# Altium PCB BALL_DROPPER_REV3.PcbDoc (part 1 of 2)
Units mil, origin at the board's own origin, x right, y up, seen from the top; angles counter-clockwise.
Board outline 3260 x 1965 mil, 4 copper layers (Top Layer, Power, GND, Bottom Layer), stack 30.634 mil thick; 128 components, 129 nets, 645 pads, 299 vias.
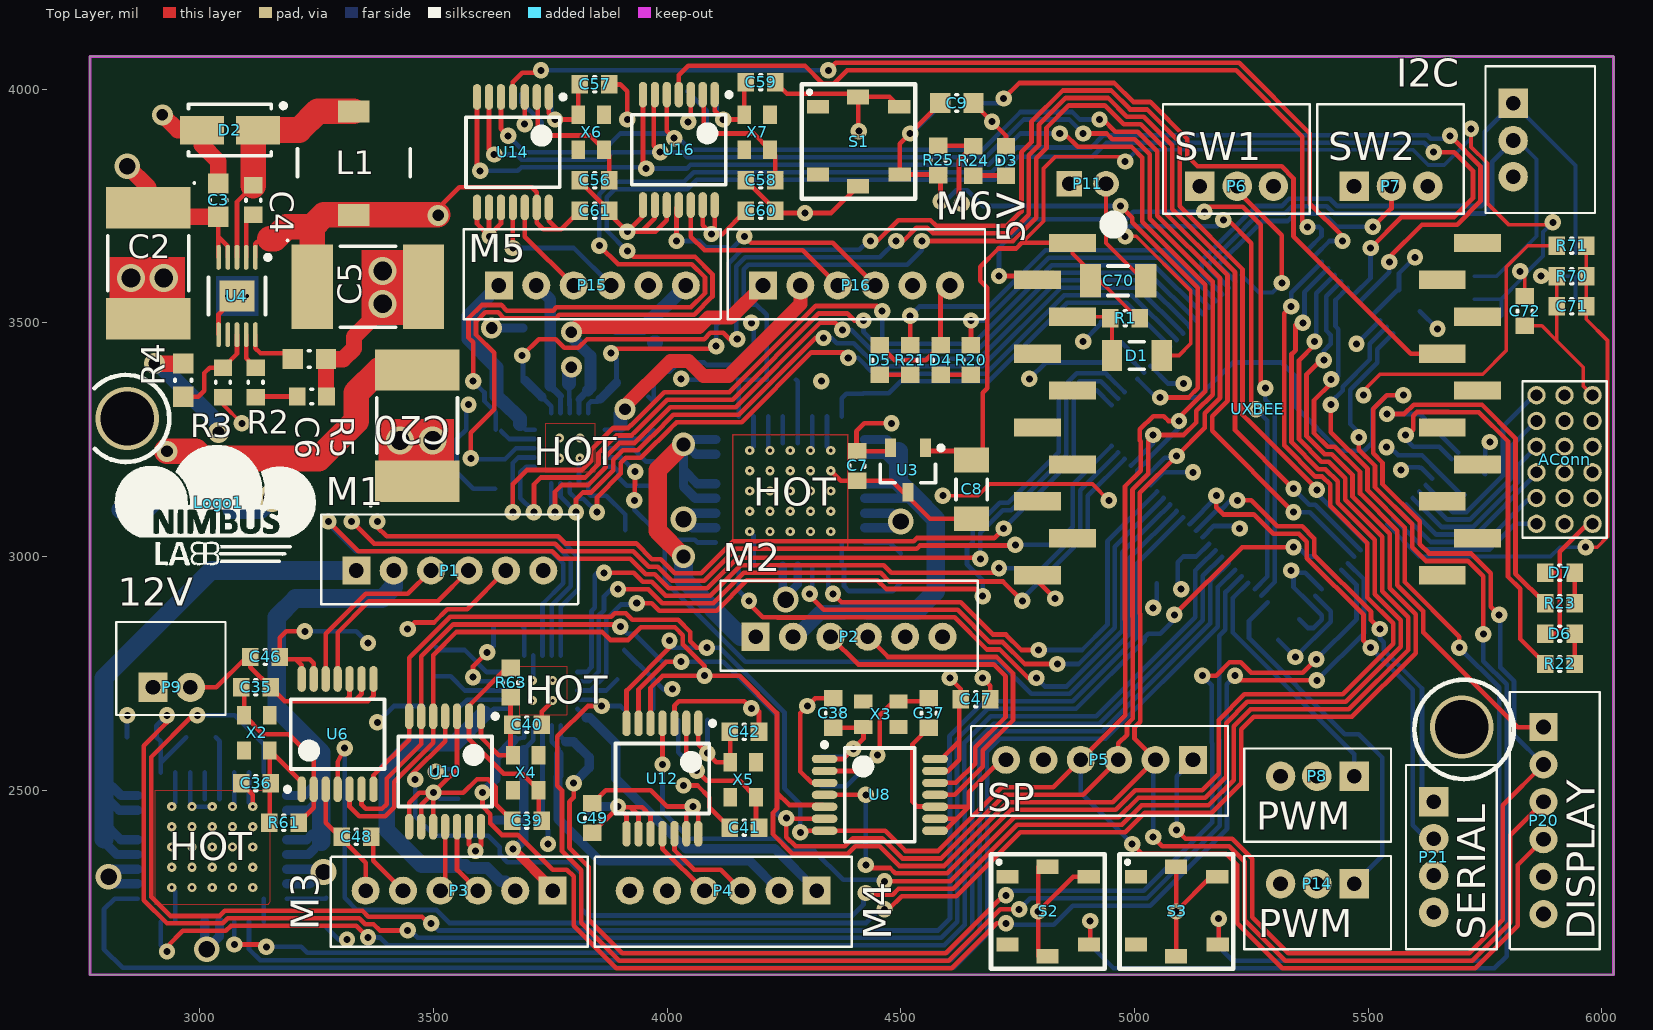
[diagram p0: Top Layer view]
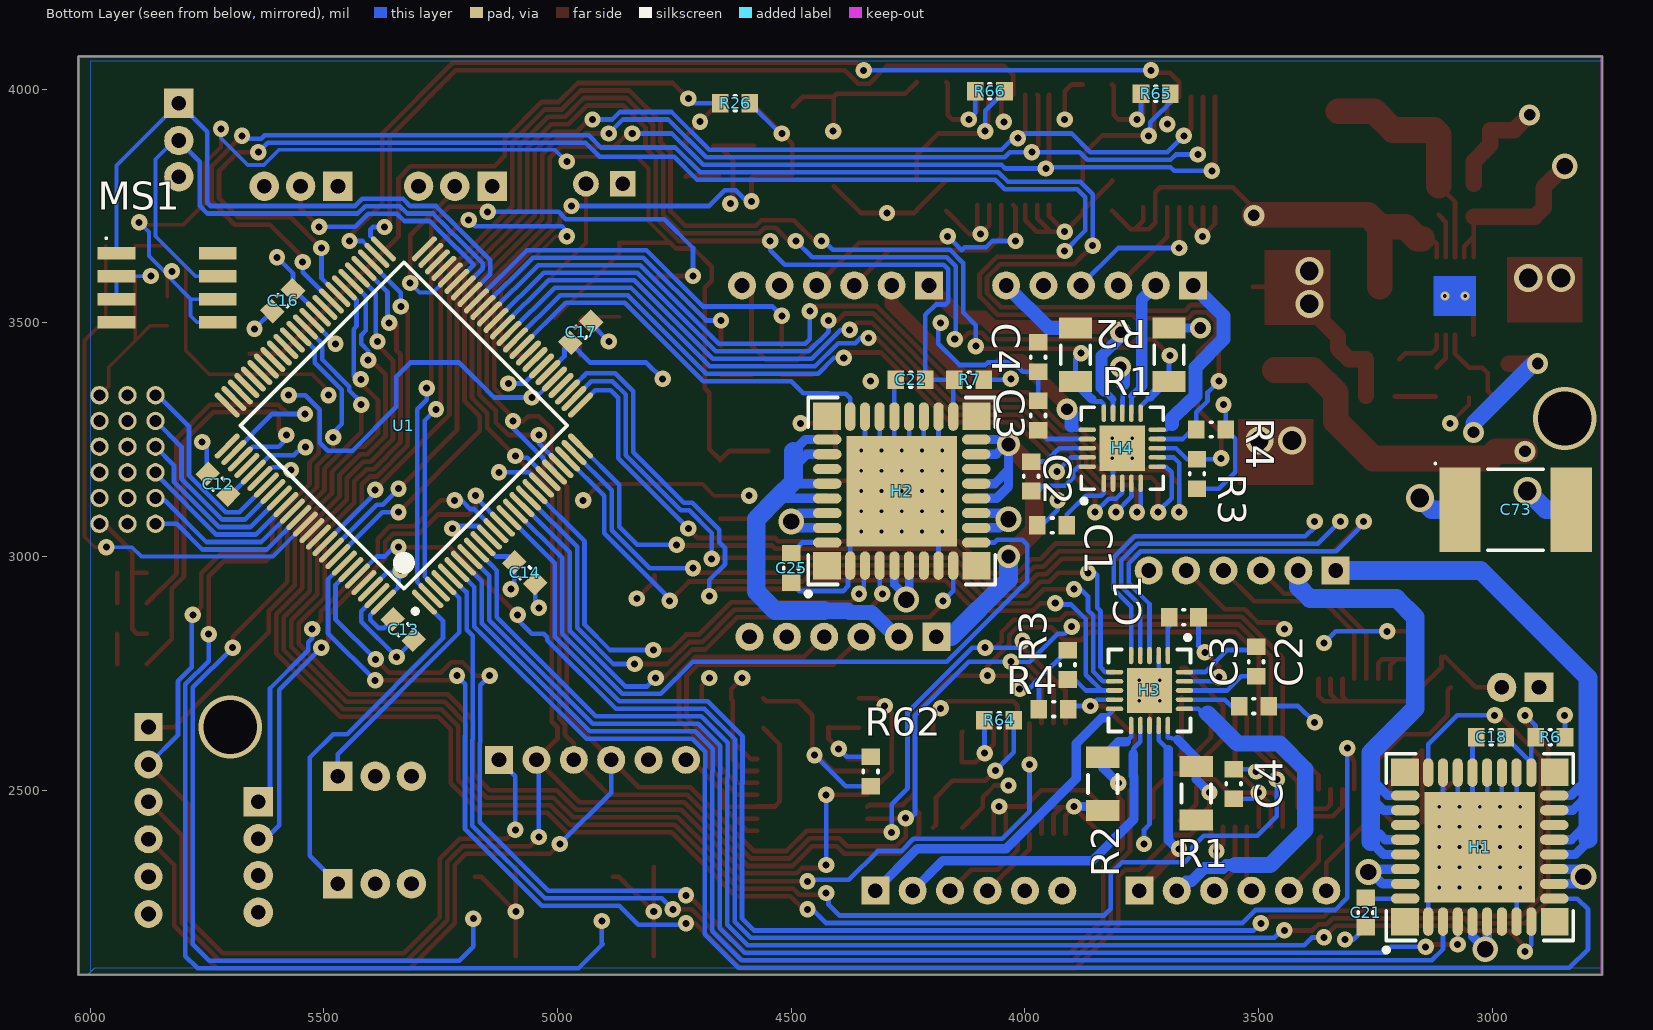
[diagram p1: Bottom Layer view, seen from below]
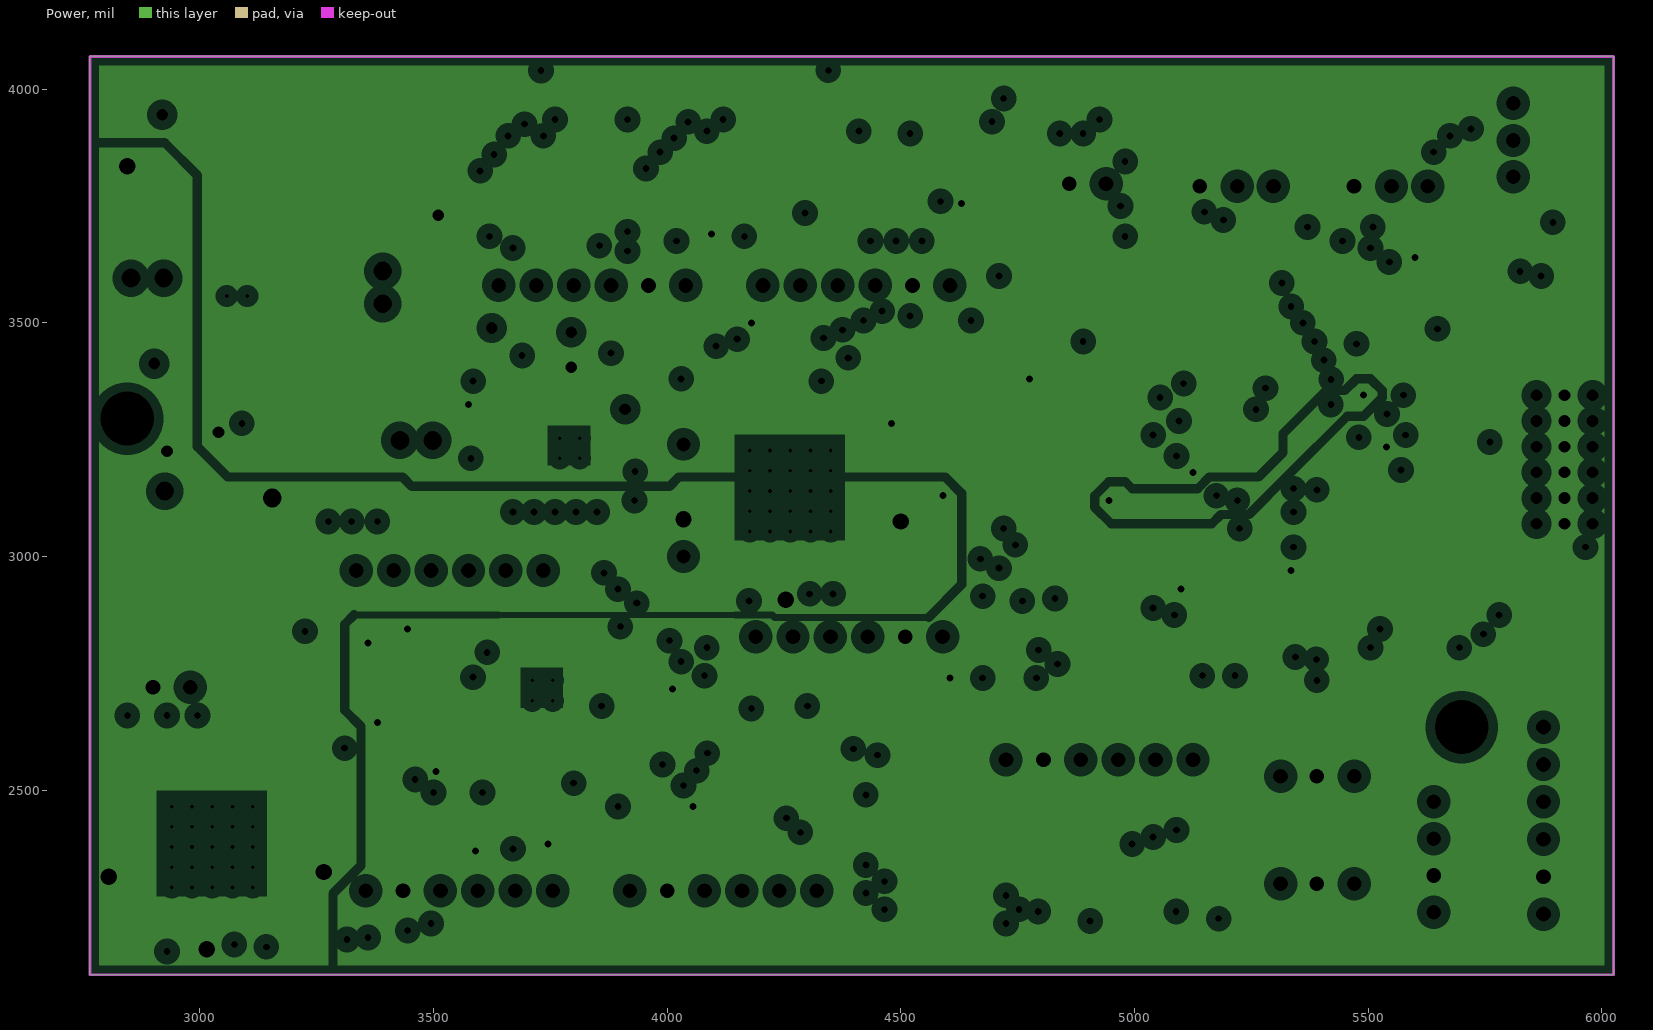
[diagram p2: Power, clearances drawn from the general rule]
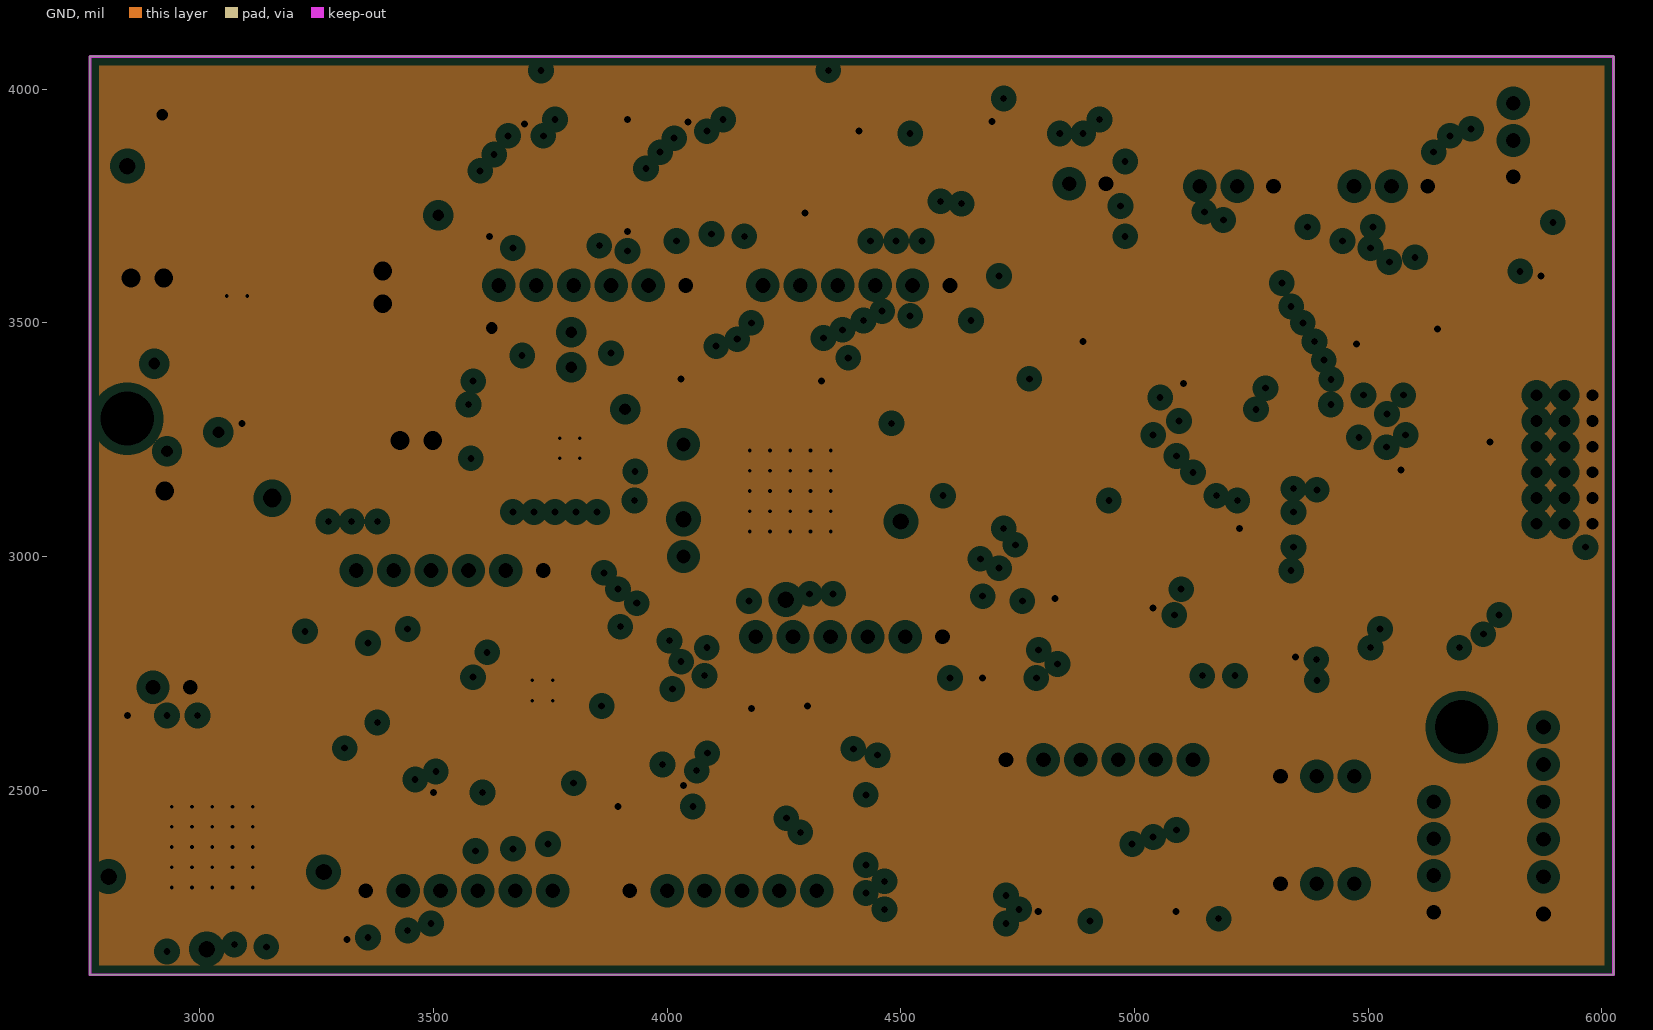
[diagram p3: GND, clearances drawn from the general rule]

## Layer stack, top to bottom
Top Solder: solder mask 0.4, Solder Resist, Dk 3.5
Top Layer: signal copper 1.4
Dielectric 1: core 10, FR-4, Dk 4.2
Power: plane copper 1.4169, net (Multiple Nets)
Dielectric 3: prepreg 5, Dk 4.2
GND: plane copper 1.4169, net GND
Dielectric 2: core 10, Dk 4.2
Bottom Layer: signal copper 1.4
Bottom Solder: solder mask 0.4, Solder Resist, Dk 3.5

## Board outline
2765,2105 6025,2105 6025,4070 2765,4070

## Design rules (kind name [scope] priority, off if disabled: settings)
Clearance [All] p1: gap=6
MinimumSolderMaskSliver [All] p1: minsoldermaskwidth=1
PlaneClearance [All] p1: clearance=20
PlaneConnect [All] p1: planeconnectstyle=Direct reliefexpansion=20 reliefentries=4 reliefconductorwidth=10 reliefairgap=10
PolygonConnect [All] p1: connectstyle=Direct reliefconductorwidth=10 reliefentries=4 polygonreliefangle="90 Angle" airgapwidth=10
RoutingVias [All] p1: holewidth=15 width=35 viastyle="Through Hole" minholewidth=15 minwidth=35 maxholewidth=40 maxwidth=60
SilkToSilkClearance [All] p1: silktosilkclearance=5
SilkToSolderMaskClearance [IsPad] p1: minsilkscreentomaskgap=5 clearancetoexposedcopper=TRUE
SolderMaskExpansion [All] p1: expansion=4
UnpouredPolygon [All] p1: allowunpoured=FALSE
Width [All] p1: maxlimit=80 minlimit=8 preferedwidth=8
24 further rules are at their usual default settings.

## Components (designator, comment, footprint, x,y, rotation, side; value= is the part's Value field where it differs from the comment)
AConn "3x6 1.27mm conn" "3x6 1.27mm conn" 5910,3195 r90 top
C1 "100nF" CAPC0603(1608)100_N 3941.65,3066.65 r180 bottom (schematic designator H4C1)
C1 "100nF" CAPC0603(1608)100_N 3660,2870 r0 bottom (schematic designator H3C1)
C2 "100nF" CAPC0603(1608)100_N 3986.65,3171.65 r90 bottom (schematic designator H4C2)
C2 "100nF" CAPC0603(1608)100_N 3505,2775 r270 bottom (schematic designator H3C2)
C2 "100uF" TantalumCap7343 2889.68,3627.32 r270 top
C3 "100nF" CAPC0603(1608)100_N 3971.65,3301.65 r270 bottom (schematic designator H4C3)
C3 "100nF" CAPC0603(1608)100_N 3510,2680 r0 bottom (schematic designator H3C3)
C3 "10uF" CAPC0603(1608)100_M 3039.68,3762.32 r270 top
C4 "CAP 10uF 10V 0603(1608)" CAPC0603(1608)100_N 3971.65,3426.65 r270 bottom (schematic designator H4C4)
C4 "CAP 10uF 10V 0603(1608)" CAPC0603(1608)100_N 3553.35,2513.35 r90 bottom (schematic designator H3C4)
C4 "470nF" CAPC0603(1608)100_N 3114.68,3762.32 r90 top
C5 "47uF" TantalumCap7343 3359.68,3577.32 r0 top
C6 "470pF" CAPC0603(1608)100_N 3239.68,3342.32 r180 top
C7 "C470nF" CAPC0603(1608)100_N 4406.61,3193.62 r90 top
C8 "33uF" CAPC1206(3216)190_M 4651.61,3143.62 r90 top
C9 "10nF" CAPC0603(1608)100_M 4620,3970 r180 top
C12 "100nF" CAPC0603(1608)100_N 5726.45,3154.71 r225 bottom
C13 "100nF" CAPC0603(1608)100_N 5330,2843.66 r45 bottom
C14 "100nF" CAPC0603(1608)100_N 5070,2965 r45 bottom
C16 "100nF" CAPC0603(1608)100_N 5588.09,3547.24 r135 bottom
C17 "100nF" CAPC0603(1608)100_N 4950,3480 r315 bottom
C18 "1uF" CAPC0603(1608)100_N 3002.6,2613.31 r180 bottom
C20 "47uF" TantalumCap7343 3465,3280 r90 top
C21 "33nF" CAPC0603(1608)100_N 3270.91,2238.31 r90 bottom
C22 "1uF" CAPC0603(1608)100_N 4244.29,3378.31 r180 bottom
C25 "33nF" CAPC0603(1608)100_N 4500,2975 r90 bottom
C35 "8.2pF" CAPC0603(1608)100_N 3120,2720 r0 top
C36 "8.2pF" CAPC0603(1608)100_N 3120,2515 r180 top
C37 "8.2pF" CAPC0603(1608)100_N 4560,2665 r270 top
C38 "8.2pF" CAPC0603(1608)100_N 4355,2665 r90 top
C39 "8.2pF" CAPC0603(1608)100_N 3700,2435 r180 top
C40 "8.2pF" CAPC0603(1608)100_N 3700,2640 r0 top
C41 "8.2pF" CAPC0603(1608)100_N 4165,2420 r180 top
C42 "8.2pF" CAPC0603(1608)100_N 4165,2625 r0 top
C46 "100nF" CAPC0603(1608)100_N 3140,2785 r0 top
C47 "100nF" CAPC0603(1608)100_N 4660,2695 r180 top
C48 "100nF" CAPC0603(1608)100_N 3335,2400 r0 top
C49 "100nF" CAPC0603(1608)100_N 3840,2440 r90 top
C56 "8.2pF" CAPC0603(1608)100_N 3845,3805 r180 top
C57 "8.2pF" CAPC0603(1608)100_N 3845,4010 r0 top
C58 "8.2pF" CAPC0603(1608)100_N 4200,3805 r180 top
C59 "8.2pF" CAPC0603(1608)100_N 4200,4015 r0 top
C60 "100nF" CAPC0603(1608)100_N 4200,3740 r180 top
C61 "100nF" CAPC0603(1608)100_N 3845,3740 r180 top
C70 "CAP 10uF 10V 1206(3216)" CAPC1206(3216)190_N 4965,3590 r0 top
C71 "CAP 100nF 25V 0603(1608)" CAPC0603(1608)100_N 5935,3535 r0 top
C72 "CAP 100nF 25V 0603(1608)" CAPC0603(1608)100_N 5835,3525 r90 top
C73 "100uF" TantalumCap7343 2950,3100 r180 bottom
D1 "diode_MBRA210LT3G" C1206 5005,3430 r0 top
D2 "diode_B340A" diode_B340A 3064.68,3912.32 r0 top
D3 "LED" RESC0603(1608)_N 4725,3846.5 r90 top
D4 "LED" RESC0603(1608)_N 4585,3420 r90 top
D5 "LED" RESC0603(1608)_N 4455,3420 r90 top
D6 "LED" RESC0603(1608)_N 5910,2835 r0 top
D7 "LED" RESC0603(1608)_N 5910,2965 r0 top
H1 "MC33887QFN" MC33887-QFN 3026.69,2378.31 r90 bottom
H2 "MC33887QFN" MC33887-QFN 4263.39,3140 r90 bottom
H3 "A3906" A3906-QFN 3733.35,2713.35 r270 bottom
H4 "A3906" A3906-QFN 3791.65,3231.65 r90 bottom
I2C "Hirose3" DF3A-3P-2DS-RA 5810,3890 r270 top
L1 "6.3uH" CDRH62B 3329.68,3842.32 r90 top
Logo1 "NimbusLogo" "NIMBUS Logo" 3040,3115 r0 top
MS1 "MS5803-05BA" MS5803-05BA 5835,3575 r180 bottom
P1 "M1" DF3A-6P-2DS 3535,2970 r0 top
P2 "M2" DF3A-6P-2DS 4389.29,2828.31 r0 top
P3 "M3" DF3A-6P-2DS 3555,2285 r180 top
P4 "M4" DF3A-6P-2DS 4120,2285 r180 top
P5 "ISP" DF3A-6P-2DS 4925,2565 r180 top
P6 "SW1" DF3A-3P-2DS-RA 5219.69,3792.32 r0 top
P7 "SW2" DF3A-3P-2DS-RA 5549.69,3792.32 r0 top
P8 "PWM" DF3A-3P-2DS 5390,2530 r180 top
P9 "12V" "DF3A-2P-2DS Vert" 2980,2720 r0 top
P11 "5V" DF3A-2P-2DS 4899.69,3797.32 r0 top
P14 "PWM" DF3A-3P-2DS 5390,2300 r180 top
P15 "M5" DF3A-6P-2DS 3840,3580 r0 top
P16 "M6" DF3A-6P-2DS 4405,3580 r0 top
P20 "DISPLAY" DF3A-6P-2DS 5875,2435 r270 top
P21 "SERIAL" DF3A-4P-2DS 5640,2475 r270 top
R1 "0.2R 5% 1206(3216)" RESC1206(3216)_N 3891.65,3431.65 r90 bottom (schematic designator H4R1)
R1 "0.2R 5% 1206(3216)" RESC1206(3216)_N 3633.35,2493.35 r270 bottom (schematic designator H3R1)
R1 "10K" RESC0603(1608)_N 4980,3510 r0 top
R2 "0.2R 5% 1206(3216)" RESC1206(3216)_N 3691.65,3431.65 r90 bottom (schematic designator H4R2)
R2 "0.2R 5% 1206(3216)" RESC1206(3216)_N 3833.35,2513.35 r270 bottom (schematic designator H3R2)
R2 "16.2K" RESC0603(1608)_N 3119.68,3372.32 r90 top
R3 "1M 5% 0603(1608)" RESC0603(1608)_N 3631.65,3176.65 r90 bottom (schematic designator H4R3)
R3 "1M 5% 0603(1608)" RESC0603(1608)_N 3908.35,2768.35 r270 bottom (schematic designator H3R3)
R3 "100K" RESC0603(1608)_N 3049.68,3372.32 r90 top
R4 "1M 5% 0603(1608)" RESC0603(1608)_N 3601.65,3271.65 r0 bottom (schematic designator H4R4)
R4 "1M 5% 0603(1608)" RESC0603(1608)_N 3938.35,2673.35 r180 bottom (schematic designator H3R4)
R4 "536K" RESC0603(1608)_M 2964.68,3377.32 r90 top
R5 "40.2K" RESC0603(1608)_M 3234.68,3422.32 r0 top
R6 "100R" RESC0603(1608)_N 2875.91,2613.31 r0 bottom
R7 "100R" RESC0603(1608)_N 4119.29,3378.31 r0 bottom
R20 "150R 5% 0603(1608)" RESC0603(1608)_N 4650,3420 r270 top
R21 "150R 5% 0603(1608)" RESC0603(1608)_N 4520,3420 r270 top
R22 "150R 5% 0603(1608)" RESC0603(1608)_N 5910,2770 r180 top
R23 "150R 5% 0603(1608)" RESC0603(1608)_N 5910,2900 r180 top
R24 "150R 5% 0603(1608)" RESC0603(1608)_N 4655,3846.5 r270 top
R25 "4.7K" RESC0603(1608)_N 4579.69,3847.32 r90 top
R26 "Jumper 0603(1608)" RESC0603(1608)_N 4620,3970 r180 bottom
R61 "1M 5% 0603(1608)" RESC0603(1608)_N 3180,2430 r180 top
R62 "1M 5% 0603(1608)" RESC0603(1608)_N 4330,2540 r90 bottom
R63 "1M 5% 0603(1608)" RESC0603(1608)_N 3665,2730 r270 top
R64 "1M 5% 0603(1608)" RESC0603(1608)_N 4055,2650 r0 bottom
R65 "1M 5% 0603(1608)" RESC0603(1608)_N 3720,3990 r0 bottom
R66 "1M 5% 0603(1608)" RESC0603(1608)_N 4075,3995 r0 bottom
R70 "27K 1% 0603(1608)" RESC0603(1608)_N 5935,3600 r0 top
R71 "90K9 1% 0603(1608)" RESC0603(1608)_N 5935,3665 r0 top
S1 "TactileSwitch_lp" LOW_PROFILE_W_GND 4409.69,3887.32 r0 top
S2 "TactileSwitch_lp" LOW_PROFILE_W_GND 4815,2240 r0 top
S3 "TactileSwitch_lp" LOW_PROFILE_W_GND 5090,2240 r0 top
U1 "Atmega2560-AU" TSQFP50P1600X1600X160-100N 5328.58,3280.21 r45 bottom
U3 "LM3480" LM3480 4515,3185 r270 top
U4 "LT3480" LT-MSE-10-EDP_L 3079.68,3557.32 r270 top
U6 "LFLS7366R-TS" LS7366RTS 3295,2620 r90 top
U8 "LFLS7366R-TS" LS7366RTS 4455,2490 r0 top
U10 "LFLS7366R-TS" LS7366RTS 3525,2540 r270 top
U12 "LFLS7366R-TS" LS7366RTS 3990,2525 r270 top
U14 "LFLS7366R-TS" LS7366RTS 3670,3865 r270 top
U16 "LFLS7366R-TS" LS7366RTS 4025,3870 r270 top
UXBEE "XBEE/XBEE Pro" "XBEE - Surface Mount" 4830,2960 r0 top
X2 "40MHz" xtal4 3170,2560 r90 top
X3 "40MHz" xtal4 4395,2615 r0 top
X4 "40MHz" xtal4 3650,2600 r270 top
X5 "40MHz" xtal4 4115,2585 r270 top
X6 "40MHz" xtal4 3790,3970 r270 top
X7 "40MHz" xtal4 4145,3970 r270 top

## Footprints (in the part's own frame and the unit in brackets; to place one, negate y for a bottom-side part, rotate by r counter-clockwise, add the part's x,y. Pads: shape width x height; smd on the part's side, far side on the other; paste and mask are expansions set on the pad)
"3x6 1.27mm conn" [mm]
  round 1 hole 0.635: 1(-3.175,-1.778) 2(-3.175,-0.254) 3(-3.175,1.27) 4(-1.778,-1.778) 5(-1.778,-0.254) 6(-1.778,1.27) 7(-0.381,-1.778) 8(-0.381,-0.254) 9(-0.381,1.27) 10(1.016,-1.778) 11(1.016,-0.254) 12(1.016,1.27) 13(2.413,-1.778) 14(2.413,-0.254) 15(2.413,1.27) 16(3.81,-1.778) 17(3.81,-0.254) 18(3.81,1.27)
  silkscreen extent -3.94,-2.54 4.57,2.03
A3906-QFN [mm]
  oval 0.95x0.25 smd: 1(-1.9,1) 2(-1.9,0.5) 3(-1.9,0) 4(-1.9,-0.5) 5(-1.9,-1) 11(1.9,-1) 12(1.9,-0.5) 13(1.9,0) 14(1.9,0.5) 15(1.9,1)
  oval 0.25x0.95 smd: 6(-1,-1.9) 7(-0.5,-1.9) 8(0,-1.9) 9(0.5,-1.9) 10(1,-1.9) 16(1,1.9) 17(0.5,1.9) 18(0,1.9) 19(-0.5,1.9) 20(-1,1.9)
  rect 2.45x2.45 smd: 21(0,0)
  silkscreen extent -3,-2.23 2.23,2.22, body extent -2.07,-2.08 2.08,2.07, height 0.8
C1206 [mm] "Chip Capacitor, Body 3.2x1.6mm, IPC High Density"
  rect 1.1x1.7 smd: 1(-1.35,0) 2(1.35,0)
  silkscreen extent -0.4,-0.75 0.4,0.75, body extent -1.7,-0.9 1.7,0.9, height 1.3
CAPC0603(1608)100_M [mm] "Chip Capacitor, Body 1.6x0.8mm, Height 1.0mm, IPC Low Density"
  rect 1.1x1.1 smd: 1(-0.9,0) 2(0.9,0)
  silkscreen extent -0.05,-0.45 0.05,0.45, body extent -0.87,-0.47 0.88,0.48, height 1
CAPC0603(1608)100_N [mm] "Chip Capacitor, Body 1.6x0.8mm, Height 1.0mm, IPC Medium Density"
  rect 0.9x1 smd: 1(-0.8,0) 2(0.8,0)
  silkscreen extent -0.05,-0.4 0.05,0.4, body extent -0.87,-0.48 0.88,0.47, height 1
CAPC1206(3216)190_M [mm] "Chip Capacitor, Body 3.2x1.6mm, Height 1.9mm, IPC Low Density"
  rect 1.35x1.9 smd: 1(-1.6,0) 2(1.6,0)
  silkscreen extent -0.55,-0.85 0.55,0.85, body extent -1.7,-0.9 1.7,0.9, height 1.9
CAPC1206(3216)190_N [mm] "Chip Capacitor, Body 3.2x1.6mm, Height 1.9mm, IPC Medium Density"
  rect 1.15x1.8 smd: 1(-1.5,0) 2(1.5,0)
  silkscreen extent -0.55,-0.8 0.55,0.8, body extent -1.7,-0.9 1.7,0.9, height 1.9
CDRH62B [mm] "Sumida Power Inductor"
  rect 1.2x1.7 smd: 1(-2.828,0) 2(2.794,0)
  silkscreen extent -0.75,-3.06 0.75,3.06, body extent -2.92,-3.15 2.92,3.15, height 3
DF3A-2P-2DS [mm] "Two terminal, Right Angle Connector"
  rect 1.4x1.4 hole 0.8: 1(-1,0)
  round 1.4 hole 0.8: 2(1,0)
  body extent -3.05,-1.5 3.05,5.7, height 5
"DF3A-2P-2DS Vert" [mm] "Two terminal, Vertical Connector"
  rect 1.6x1.6 hole 0.8: 1(-2.032,0)
  round 1.6 hole 0.8: 2(0,0)
  silkscreen extent -4.03,-1.5 1.91,3.56, body extent -4.06,-1.52 1.91,3.56, height 5
DF3A-3P-2DS [mm]
  rect 1.6x1.6 hole 0.8: 1(-2.032,0)
  round 1.6 hole 0.8: 2(0,0) 3(1.968,0)
  silkscreen extent -4.03,-1.5 3.94,3.56, body extent -4.06,-1.52 3.94,3.56, height 5
DF3A-3P-2DS-RA [mm]
  rect 1.6x1.6 hole 0.8: 1(-2.032,0)
  round 1.6 hole 0.8: 2(0,0) 3(1.968,0)
  silkscreen extent -4.03,-1.5 3.94,4.45, body extent -4.06,-1.52 3.94,4.45, height 5
DF3A-4P-2DS [mm] "Hirose 4 Pin"
  rect 1.6x1.6 hole 0.8: 1(0,0)
  round 1.6 hole 0.8: 2(2,0) 3(4,0) 4(6,0)
  silkscreen extent -2,-1.5 8,3.43, body extent -2.03,-1.52 8,3.43, height 5
DF3A-6P-2DS [mil]
  rect 60x60 hole 31.5: 1(-200,0)
  round 60 hole 31.5: 2(-120,0) 3(-40,0) 4(40,0) 5(120,0) 6(200,0)
  silkscreen extent -275,-72 275,120, body extent -275,-75 277,120, height 197
diode_B340A [mm] "Molded Diode, 2-Leads, Body 4.25x2.68mm, IPC Medium Density"
  rect 2.4x1.55 smd: 1(-1.525,0) 2(1.525,0)
  silkscreen extent -2.25,-1.4 3.03,1.45, body extent -2.25,-1.4 2.25,1.39, height 2.29
LM3480 [mm] "SOT23, 3-Leads, Body 2.92x2.37mm, Pitch 0.95mm, IPC Medium Density"
  rect 1x0.6 smd: 1(-1.2,0.95) 2(-1.2,-0.95) 3(1.2,0)
  silkscreen extent -1.32,-1.5 0.7,1.93, body extent -0.7,-1.52 0.7,1.52, height 1.12
LOW_PROFILE_W_GND [mm]
  rect 1.2x0.75 smd: 1(-2.21,1.905) 2(-2.21,-1.778) 3(2.235,-1.778) 4(2.21,1.905)
  rect 1.2x0.8 smd: GND(-0.025,-2.413) GND(-0.025,2.438)
  silkscreen extent -3.1,-3.1 3.07,3.12, body extent -2.51,-2.51 2.51,2.51, height 1.5
LS7366RTS [mm] "TSOP, 14-Leads, Body 5.00x4.50mm, Pitch 0.65mm, IPC Medium Density"
  oval 1.4x0.45 smd: 1(-3,1.95) 2(-3,1.3) 3(-3,0.65) 4(-3,0) 5(-3,-0.65) 6(-3,-1.3) 7(-3,-1.95) 8(3,-1.95) 9(3,-1.3) 10(3,-0.65) 11(3,0) 12(3,0.65) 13(3,1.3) 14(3,1.95)
  silkscreen extent -3.12,-2.55 1.9,2.85, body extent -2.3,-2.55 2.3,2.55, height 1.1
LT-MSE-10-EDP_L [mm] "SOP, 10-Leads, Body 3.1x3.1mm, Pitch 0.5mm, Thermal Pad 1.88x1.68mm, IPC High Density"
  oval 1.35x0.25 smd mask+0.082: 1(-2.1,1) 2(-2.1,0.5) 3(-2.1,0) 4(-2.1,-0.5) 5(-2.1,-1) 6(2.1,-1) 7(2.1,-0.5) 8(2.1,0) 9(2.1,0.5) 10(2.1,1)
  rect 1.68x1.88 smd mask+0.082: 11(0,0)
  silkscreen extent -2.22,-1.55 1.02,1.8, body extent -1.55,-1.55 1.55,1.55, height 1.1
MC33887-QFN [mm] "QFN, 32-Leads, Body 9.00x9.00mm, Pitch 0.80mm, Thermal Pad 6.00x6.00mm, IPC Medium Density"
  rect 1.5x1.5 smd: 1(-4.064,4.064) 10(-4.064,-4.064) 19(4.064,-4.064) 28(4.064,4.064)
  oval 1.55x0.55 smd: 2(-4.05,2.8) 3(-4.05,2) 4(-4.05,1.2) 5(-4.05,0.4) 6(-4.05,-0.4) 7(-4.05,-1.2) 8(-4.05,-2) 9(-4.05,-2.8) 20(4.05,-2.8) 21(4.05,-2) 22(4.05,-1.2) 23(4.05,-0.4) 24(4.05,0.4) 25(4.05,1.2) 26(4.05,2) 27(4.05,2.8)
  oval 0.55x1.55 smd: 11(-2.8,-4.05) 12(-2,-4.05) 13(-1.2,-4.05) 14(-0.4,-4.05) 15(0.4,-4.05) 16(1.2,-4.05) 17(2,-4.05) 18(2.8,-4.05) 29(2.8,4.05) 30(2,4.05) 31(1.2,4.05) 32(0.4,4.05) 33(-0.4,4.05) 34(-1.2,4.05) 35(-2,4.05) 36(-2.8,4.05)
  rect 6x6 smd: 37(0,0)
  silkscreen extent -5.71,-5.08 5.08,5.21, body extent -4.5,-4.5 4.5,4.5, height 2.1
MS5803-05BA [mm] "Chip Array, Flat, 8-Leads, Pitch 1.25mm,  Body 6.20x6.40mm,  IPC Medium Density"
  rect 2.05x0.7 smd: 1(-2.75,1.875) 2(-2.75,0.625) 3(-2.75,-0.625) 4(-2.75,-1.875) 5(2.75,-1.875) 6(2.75,-0.625) 7(2.75,0.625) 8(2.75,1.875)
  silkscreen extent -3.36,2.64 -3.26,2.74, body extent -3.3,-3.2 3.3,3.2, height 3.03
"NIMBUS Logo" [mil] "NIMBUS Logo Silkscreen"
  silkscreen extent -222,-134 208,123
RESC0603(1608)_M [mm] "Chip Resistor, Body 1.6x0.8mm, IPC Low Density"
  rect 1.1x1.1 smd: 1(-0.9,0) 2(0.9,0)
  silkscreen extent -0.05,-0.45 0.05,0.45, body extent -0.85,-0.47 0.85,0.47, height 0.6
RESC0603(1608)_N [mm] "Chip Resistor, Body 1.6x0.8mm, IPC Medium Density"
  rect 0.9x1 smd: 1(-0.8,0) 2(0.8,0)
  silkscreen extent -0.05,-0.4 0.05,0.4, body extent -0.85,-0.47 0.85,0.47, height 0.6
RESC1206(3216)_N [mm] "Chip Resistor, Body 3.2x1.6mm, IPC Medium Density"
  rect 1.15x1.8 smd: 1(-1.45,0) 2(1.45,0)
  silkscreen extent -0.5,-0.8 0.5,0.8, body extent -1.67,-0.87 1.67,0.87, height 0.75
TantalumCap7343 [mm]
  rect 2.25x4.6 smd: 1(-3.025,0) 2(3.025,0)
  silkscreen extent -4.41,-2.2 1.5,2.56, body extent -3.8,-2.3 3.8,2.3, height 1.5
TSQFP50P1600X1600X160-100N [mm] "TSQFP, 100-Leads, Body 14.00x14.00mm, Pitch 0.50mm, IPC Medium Density"
  oval 1.8x0.3 smd: 1(-7.575,6) 2(-7.575,5.5) 3(-7.575,5) 4(-7.575,4.5) 5(-7.575,4) 6(-7.575,3.5) 7(-7.575,3) 8(-7.575,2.5) 9(-7.575,2) 10(-7.575,1.5) 11(-7.575,1) 12(-7.575,0.5) 13(-7.575,0) 14(-7.575,-0.5) 15(-7.575,-1) 16(-7.575,-1.5) 17(-7.575,-2) 18(-7.575,-2.5) 19(-7.575,-3) 20(-7.575,-3.5) 21(-7.575,-4) 22(-7.575,-4.5) 23(-7.575,-5) 24(-7.575,-5.5) 25(-7.575,-6) 51(7.575,-6) 52(7.575,-5.5) 53(7.575,-5) 54(7.575,-4.5) 55(7.575,-4) 56(7.575,-3.5) 57(7.575,-3) 58(7.575,-2.5) 59(7.575,-2) 60(7.575,-1.5) 61(7.575,-1) 62(7.575,-0.5) 63(7.575,0) 64(7.575,0.5) 65(7.575,1) 66(7.575,1.5) 67(7.575,2) 68(7.575,2.5) 69(7.575,3) 70(7.575,3.5) 71(7.575,4) 72(7.575,4.5) 73(7.575,5) 74(7.575,5.5) 75(7.575,6)
  oval 0.3x1.8 smd: 26(-6,-7.575) 27(-5.5,-7.575) 28(-5,-7.575) 29(-4.5,-7.575) 30(-4,-7.575) 31(-3.5,-7.575) 32(-3,-7.575) 33(-2.5,-7.575) 34(-2,-7.575) 35(-1.5,-7.575) 36(-1,-7.575) 37(-0.5,-7.575) 38(0,-7.575) 39(0.5,-7.575) 40(1,-7.575) 41(1.5,-7.575) 42(2,-7.575) 43(2.5,-7.575) 44(3,-7.575) 45(3.5,-7.575) 46(4,-7.575) 47(4.5,-7.575) 48(5,-7.575) 49(5.5,-7.575) 50(6,-7.575) 76(6,7.575) 77(5.5,7.575) 78(5,7.575) 79(4.5,7.575) 80(4,7.575) 81(3.5,7.575) 82(3,7.575) 83(2.5,7.575) 84(2,7.575) 85(1.5,7.575) 86(1,7.575) 87(0.5,7.575) 88(0,7.575) 89(-0.5,7.575) 90(-1,7.575) 91(-1.5,7.575) 92(-2,7.575) 93(-2.5,7.575) 94(-3,7.575) 95(-3.5,7.575) 96(-4,7.575) 97(-4.5,7.575) 98(-5,7.575) 99(-5.5,7.575) 100(-6,7.575)
  silkscreen extent -7.7,-6.28 6.28,6.82, body extent -7,-7 7,7, height 1.6
"XBEE - Surface Mount" [mil] "XBEE, Mounted on NorComp 28631006RP2 Headers"
  rect 100x39 smd: 1(37.5,711) 2(-37.5,632) 3(37.5,553) 4(-37.5,474) 5(37.5,395) 6(-37.5,316) 7(37.5,237) 8(-37.5,158) 9(37.5,79) 10(-37.5,0) 11(828.62,0) 12(903.66,79) 13(828.62,158) 14(903.66,237) 15(828.62,316) 16(903.66,395) 17(828.62,474) 18(903.66,553) 19(828.62,632) 20(903.66,711)
  silkscreen extent 110,735 140,765, body extent -47,-79 913,1008, height 280
xtal4 [mm]
  rect 1x0.75 smd: 1(0.635,1.905) 2(0.635,0.508) 3(2.54,0.508) 4(2.54,1.905)
  Mechanical 1 keep-out lines w0.254: 0,2.413 0,0.127 0.127,0 3.048,0 3.175,0.127 3.175,2.286 3.048,2.413 0,2.413
  body extent 0.25,0.25 2.92,2.16, height 0.55

## Part data
C1 C1 C2 C2 C3 C3 C12 C13 C14 C16 C17 C46 C47 C48 C49 C60 C61: library part CMP-1035-02582-1, "CAP 100nF 10V -20% to +80% 0603 (1608 Metric) Thickness 1mm SMD"
C2 C5 C20 C73: library part TantalumCap7343
C3: library part CMP-1035-02800-1, "CAP 10uF 10V ±20% 0603 (1608 Metric) Thickness 1mm SMD"
C4 C4: library part CMP-1035-02799-1, "CAP 10uF 10V ±10% 0603 (1608 Metric) Thickness 1mm SMD"
C4: library part CMP-1035-02701-1, "CAP 470nF 16V ±20% 0603 (1608 Metric) Thickness 1mm SMD"
C6: library part CMP-1035-01664-1, "CAP 470pF 16V ±2% 0603 (1608 Metric) Thickness 1mm SMD"
C7: library part CMP-1035-02696-1, "CAP 470nF 10V ±10% 0603 (1608 Metric) Thickness 1mm SMD"
C8: library part CMP-1037-04997-1, "CAP 33uF 10V ±20% 1206 (3216 Metric) Thickness 1.9mm SMD"
C9: library part CMP-1035-02304-1, "CAP 10nF 10V ±2% 0603 (1608 Metric) Thickness 1mm SMD"
C18 C22: library part CMP-1035-02740-1, "CAP 1uF 25V ±10% 0603 (1608 Metric) Thickness 1mm SMD"
C21 C25: library part CMP-1035-02463-1, "CAP 33nF 25V ±5% 0603 (1608 Metric) Thickness 1mm SMD"
C35 C36 C37 C38 C39 C40 C41 C42 C56 C57 C58 C59: library part CMP-1035-00477-1, "CAP 8.2pF 10V ±0.1pF 0603 (1608 Metric) Thickness 1mm SMD"
C70: library part CMP-1037-04966-1, "CAP 10uF 10V ±5% 1206 (3216 Metric) Thickness 1.9mm SMD"
C71 C72: library part CMP-1035-02587-1, "CAP 100nF 25V ±5% 0603 (1608 Metric) Thickness 1mm SMD"
D3 D4 D5 D6 D7: library part CMP-1012-00001-1
L1: library part TYS6045_inductor
P1 P2 P3 P4 P5 P15 P16 P20: library part Hirose6
P6 P7 P8 P14: library part Hirose3
P9: library part Hirose2
P11: library part "Header 2", "Header, 2-Pin"
P21: library part Hirose4
R1 R1 R2 R2: library part CMP-1014-00002-1, "0.2R 0.25W 5% 1206 (3216 Metric)  SMD"
R1: library part CMP-1012-00098-1, "10K 0.1W 5% 0603 (1608 Metric)  SMD"
R2: library part CMP-1012-00645-1, "16K2 0.1W 1% 0603 (1608 Metric)  SMD"
R3 R3 R4 R4: library part CMP-1012-00054-1, "1M 0.1W 5% 0603 (1608 Metric)  SMD"
R3: library part CMP-1012-00122-1, "100K 0.1W 5% 0603 (1608 Metric)  SMD"
R4: library part CMP-1012-00819-1, "536K 0.1W 1% 0603 (1608 Metric)  SMD"
R5: library part CMP-1012-00691-1, "40K2 0.1W 1% 0603 (1608 Metric)  SMD"
R6 R7: library part CMP-1012-00050-1, "100R 0.1W 5% 0603 (1608 Metric)  SMD"
R20 R21 R22 R23 R24: library part CMP-1012-00054-1, "150R 0.1W 5% 0603 (1608 Metric)  SMD"
R25: library part CMP-1012-00090-1, "4K7 0.1W 5% 0603 (1608 Metric)  SMD"
R26: library part CMP-1012-00001-1, "Jumper 0603 (1608 Metric)"
R61 R62 R63 R64 R65 R66: library part CMP-1012-00146-1, "1M 0.1W 5% 0603 (1608 Metric)  SMD"
R70: library part CMP-1012-00670-1, "27K 0.1W 1% 0603 (1608 Metric)  SMD"
R71: library part CMP-1012-00731-1, "90K9 0.1W 1% 0603 (1608 Metric)  SMD"
U1: "ATMEGA2560-16AURCT-ND"
U3: "LM3480IM3-3.3/NOPBCT-ND"
U4: library part CMP-0491-01005-1, "2 A, 2.4 MHz Step-Down Switching Regulator with 70 uA Quiescent Current, 10-pin SOP (MSE-10-EDP), -40 to 85 degC, Pb-Free, Tape and Reel"
UXBEE: library part "Xbee Pro"
X2 X3 X4 X5 X6 X7: library part xtal4

## Via types
v1: diameter 35, hole 15, Top Layer to Bottom Layer, tented both sides, 211 vias
v2: diameter 19.68, hole 7.87, Top Layer to Bottom Layer, tented both sides, 60 vias
v3: diameter 45, hole 25, Top Layer to Bottom Layer, tented both sides, 9 vias
v4: diameter 60, hole 40, Top Layer to Bottom Layer, tented both sides, 8 vias
v5: diameter 55, hole 35, Top Layer to Bottom Layer, tented both sides, 7 vias
v6: diameter 50, hole 30, Top Layer to Bottom Layer, tented both sides, 2 vias
v7: diameter 135, hole 115, Top Layer to Bottom Layer, 2 vias

## Nets (pads, with @x,y where several pads share a name; then routed paths per layer and width w, separated by ;. In a path a pad name is that pad's centre, name@x,y a point inside that pad or via, vN(x,y) a via of type N, cw(c..) or ccw(c..) an arc to the next point about the centre after c; other vN are vias at no path point)
3.3V: C8.2 C70.1 C72.2 MS1.5 MS1.6 R1.2@5011.5,3510 U3.1 UXBEE.1 | length 2918.2
  Top Layer w8: 4758.63,3671 4805,3717.37 4805,3830 4830,3855 4970,3855 v1(4980,3845) ; UXBEE.1@4867.5,3671 4867.5,3648.45 R1.2@5005.94,3510 ; v1(5720,3915) 5720,3876.21 5755,3841.21 5755,3755 5800,3710 5890,3710 v1(5895,3715) ; v1(5825,3610) 5826.33,3610 5835.11,3601.22 5835,3601.11 C72.2@5835,3556.5
  Top Layer w10: U3.1@4549.02,3225.87 4632.36,3225.87 C8.2@4651.61,3206.61 4675,3230 4675,3350 4685,3360 4685,3575 4670,3590 4670,3620 4709,3659 4746.63,3659 4758.63,3671 UXBEE.1@4867.5,3671
  Bottom Layer w8: v1(4980,3845) 5005,3870 5596.11,3870 5628.61,3837.5 5662.5,3837.5 5720,3895 v1(5720,3915) ; MS1.5@5726.73,3501.18 5771.18,3501.18 5785,3515 5785,3551.11 ; MS1.6@5726.73,3550.39 5784.28,3550.39 5785,3551.11 ; v1(5895,3715) 5874,3694 5874,3642.89 5829,3597.89 5829,3595.11 5785,3551.11
5V: AConn.2 AConn.5 AConn.8 AConn.11 AConn.14 AConn.17 C3.1@3478.5,2680 C3.1@3971.65,3333.15 C4.2@3553.35,2544.84 C4.2@3971.65,3395.16 C5.1 C7.2 C12.2 C13.2 C14.2 C16.2 C17.2 C46.2 C47.2 C48.2 C49.2 C60.2 C61.2 H3.13 H4.13 L1.1 P1.5 P2.5 P3.5 P4.5 P5.5 P6.1 P7.1 P8.2 P11.1 P14.2 P15.5 P16.5 P20.5 P21.3 R3.1@3631.65,3145.16 R3.1@3908.35,2799.84 R4.1@3570.16,3271.65 R4.1@3969.84,2673.35 R4.2@2964.68,3412.76 R24.1 R25.2 U1.10 U1.19 U1.31 U1.61 U1.80 U1.98 U1.100 U3.2 U4.1 U6.13 U6.14 U8.13 U8.14 U10.13 U10.14 U12.13 U12.14 U14.13 U14.14 U16.13 U16.14 | length 6123
  Top Layer w10: U4.1@3119.06,3640 3119.06,3669.06 3130,3680 3150,3680 ; U6.14@3218.23,2738.11 3218.23,2767.52 3205.75,2780 ; v1(3225,2840) 3185,2840 3171.5,2826.5 C46.2@3171.5,2785 3176.5,2780 3205.75,2780 ; U6.13@3243.82,2738.11 3243.82,2771.18 3235,2780 3205.75,2780 ; C48.2@3366.5,2400 3371,2395.5 3371,2349 P3.5@3435,2285 ; v1(3445,2845) 3458.81,2858.81 3501.19,2858.81 3529.37,2887 3572,2887 P1.5@3655,2970 ; v3@3509.02,3730.98 3509.02,3744.02 3555,3790 3710,3790 3721.18,3778.82 U14.13@3721.18,3746.89 3721.18,3713.82 3735,3700 3765,3700 ; U10.13@3576.18,2421.89 3576.18,2383.82 v1(3590,2370) 3601.77,2381.77 U10.14@3601.77,2421.89 ; U14.14@3746.77,3746.89 3746.77,3718.23 3765,3700 ; C61.2@3813.5,3740 3773.5,3700 3765,3700 ; C49.2@3840,2471.5 3868.5,2500 3965,2500 4000,2465 v1(4055,2465) ; U12.13@4041.18,2406.89 4041.18,2451.18 v1(4055,2465) ; U12.14@4066.77,2406.89 4066.77,2453.23 v1(4055,2465) ; U16.13@4076.18,3751.89 4076.18,3708.82 v1(4095,3690) ; U16.14@4101.77,3751.89 4101.77,3696.77 v1(4095,3690) ; C60.2@4168.5,3740 4118.5,3690 v1(4095,3690) ; U3.2@4474.21,3225.87 4473.46,3225.12 C7.2@4406.61,3225.12 4405,3226.73 4405,3267.98 4422.02,3285 v1(4480,3285) ; U8.13@4573.11,2541.18 4601.18,2541.18 4625,2565 4625,2605 ; U8.14@4573.11,2566.77 4586.77,2566.77 4625,2605 ; R25.2@4579.69,3878.82 R24.1@4666.18,3878.82 ; v1(4605,2740) 4628.5,2716.5 C47.2@4628.5,2695 4625,2691.5 4625,2605 ; v1(4630,3755) 4624.31,3760.69 4624.31,3847.31 R24.1@4655,3877.99
  Top Layer w35: v3(2902.76,3412.76) R4.2@2964.68,3412.76
  Top Layer w55: 3150,3680 3160,3680 3185.59,3705.59 3240.59,3705.59 ; C5.1@3240.59,3577.32 3240.59,3705.59 ; v3@3509.02,3730.98 L1.1@3329.68,3730.98 3265.98,3730.98 3240.59,3705.59
  Bottom Layer w10: v1(3225,2840) 3335,2840 v1(3360,2815) ; v1(3380,2645) 3415,2680 C3.1@3478.5,2680 ; v1(3505,2540) 3509.84,2544.84 C4.2@3553.35,2544.84 ; v1(3575,3325) 3570.16,3320.16 R4.1@3570.16,3271.65 3550,3251.5 3550,3180 3584.84,3145.16 R3.1@3631.65,3145.16 ; H3.13@3733.35,2638.54 3733.35,2426.96 3745,2415.3 v1(3745,2385) ; 3790,3370 H4.13@3791.65,3306.46 ; R3.1@3908.35,2799.84 3969.84,2738.35 ; C3.1@3960.16,3341.65 3970.16,3331.65 C3.1@3971.65,3333.15 C4.2@3971.65,3395.16 4004.85,3395.16 4018.2,3408.5 4018.5,3408.5 4025,3415 4079.7,3415 4084.85,3409.85 4139.85,3409.85 4185,3455 4185,3495 v1(4180,3500) ; R4.1@3969.84,2673.35 3969.84,2738.35 ; v1(4011.2,2716.5) 4012.7,2715 3993.19,2715 3969.84,2738.35 ; v1(4775,3380) 4810,3415 4929.54,3415 C17.2@4972.27,3457.73 4984.78,3445.22 4984.78,3429.13 U1.31@5020.27,3393.65 ; U1.19@5034.18,3152.84 5061.34,3180 v1(5125,3180) ; C14.2@5092.27,2987.27 5092.27,2937.73 v1(5099.85,2930.15) ; C14.2@5092.27,2987.73 5104.54,3000 5131.89,3000 U1.10@5159.46,3027.57 ; C13.2@5352.27,2865.94 5371.01,2847.2 5383.03,2847.2 5400.71,2864.88 5400.71,2874.01 U1.100@5372.43,2902.29 5340,2934.72 5340,2965 5365.4,2965 U1.98@5400.27,2930.13 ; U1.61@5511.62,3518.92 5562.2,3569.51 C16.2@5565.82,3569.51 5565.82,3605.82 v1(5600,3640) ; v1(5539,3234) 5546.3,3234 5563.81,3216.5 5615,3216.5 U1.80@5650.82,3180.68 5701.62,3129.88 C12.2@5703.93,3127.57 ; C12.2@5704.18,3132.43 C12.2@5706.07,3132.43
  Bottom Layer w30: 3790,3370 3790,3400 v3(3795,3405)
  Bottom Layer w35: v3(2902.76,3412.76) 2911.73,3412.76 3040,3284.49 v3(3040,3265.51)
  other v1: 5335,2970
  other v3: 3510,3730
12V: C2.1@2889.68,3746.42 C3.2@3039.69,3726.89 C20.2 C73.1 H1.5 H1.6 H1.12 H1.13 H1.34 H1.35 H2.5 H2.6 H2.12 H2.13 H2.34 H2.35 P9.1 R71.1 U4.4 U4.5 | length 3135.4
  Top Layer w8: v1(4590,3130) 4665,3130 4690,3155 4910,3155 v1(4945,3120) ; v1(5490,3345) 5500,3355 5495,3360 5525,3390 5745,3390 5795,3440 5795,3618.89 5841.11,3665 R71.1@5903.5,3665
  Top Layer w10: U4.5@3039.69,3640.63 3039.69,3683.76 ; C3.2@3039.69,3726.89 3039.69,3683.76 ; U4.4@3060,3640 3060,3663.44 3039.69,3683.76
  Top Layer w35: v5(2845,3835) 2889.68,3790.32 C2.1@2889.68,3746.42 2909.21,3726.89 C3.2@3039.69,3726.89
  Top Layer w55: v3(2930,3225) 2990.8,3225 3006.29,3209.51 3254.51,3209.51 3335,3290 3335,3350 3384.09,3399.09 C20.2@3465,3399.09
  Bottom Layer w18: H2.6@4247.64,2980.55 4247.64,2914.17 v5(4254,2907.81) 4254,2914.96 4279.13,2940.1 H2.5@4279.13,2980.55 ; v5@4258.23,2912.04 v5@4265,2905.28
  Bottom Layer w20: H1.12@2867.24,2299.57 2810.43,2299.57 2795,2315 2811.06,2331.06 H1.13@2867.24,2331.06 ; v5@3010.94,2164.06 H1.6@3010.94,2218.86 ; v5(3015,2160) 3042.44,2187.44 H1.5@3042.44,2218.86 ; H1.35@3186.14,2299.57 3234.57,2299.57 3260,2325 v5(3265,2325) 3258.94,2331.06 H1.34@3186.14,2331.06 ; H2.12@4103.94,3061.26 4053.74,3061.26 v5(4035,3080) 4047.76,3092.76 H2.13@4103.94,3092.76 ; H2.35@4422.83,3061.26 4486.26,3061.26 v5(4500,3075) 4482.24,3092.76 H2.34@4422.83,3092.76
  Bottom Layer w40: C73.1@3069.09,3100 3130,3100 v4(3155,3125)
  other v5: 2805,2315
A0: AConn.3 U1.87 | length 357.7
  Bottom Layer w10: U1.87@5553.38,3083.25 5621.64,3014.99 5759.99,3014.99 5815,3070 AConn.3@5860,3070
A1: AConn.6 U1.86 | length 357
  Bottom Layer w10: U1.86@5567.3,3097.17 5633.48,3030.99 5750.99,3030.99 5840,3120 AConn.6@5860,3120
A2: AConn.9 U1.85 | length 354.2
  Bottom Layer w10: U1.85@5581.22,3111.08 5645.32,3046.99 5730.01,3046.99 AConn.9@5856.51,3173.49
A3: AConn.12 U1.84 | length 382.5
  Bottom Layer w10: U1.84@5595.14,3125 5657.15,3062.99 5723.38,3062.99 5820.5,3160.11 5820.5,3195.5 AConn.12@5860,3235
A4: AConn.15 U1.83 | length 402.9
  Bottom Layer w10: U1.83@5609.06,3138.92 5668.99,3078.99 5716.75,3078.99 5804.5,3166.74 5804.5,3234.5 AConn.15@5860,3290
A5: AConn.18 U1.82 | length 424.7
  Bottom Layer w10: U1.82@5622.98,3152.84 5680.83,3094.99 5710.12,3094.99 5788.5,3173.36 5788.5,3278.5 AConn.18@5857.5,3347.5
BUTTON1: S2.3 U1.64 | length 2587.4
  Top Layer w10: S2.3@4903,2170 4905,2172 v1(4905,2220) ; v1(5480,3255) 5480,3228.57 5514.5,3194.07 5514.5,3148.13 5594,3068.63 5594,3020 5623.5,2990.5 5713.18,2990.5 5746.31,2957.36 v1(5746.31,2833.69)
  Bottom Layer w10: v1(4905,2220) 4905,2172.95 4903,2170.95 4955,2118.95 5770,2118.95 5796,2144.95 5796,2726.63 5746.31,2776.31 v1(5746.31,2833.69) ; v1(5480,3255) 5480,3265 5461.5,3283.5 5461.5,3356.8 5519.5,3414.8 5519.5,3443.29 U1.64@5553.38,3477.17
BUTTON2: S3.3 U1.63 | length 2262.5
  Top Layer w10: S3.3@5178,2170 5180,2172 v1(5180,2225) ; v1(5420,3325) 5420,3265.94 5498.5,3187.44 5498.5,3141.5 5578,3062 5578,2945.44 5695,2828.44 v1(5695,2805)
  Bottom Layer w10: v1(5180,2225) 5180,2164.95 5210,2134.95 5745,2134.95 5780,2169.95 5780,2720 v1(5695,2805) ; v1(5420,3325) 5420,3329.7 5445.5,3355.2 5445.5,3363.43 5503.5,3421.43 5503.5,3455.13 U1.63@5539.46,3491.09
DISP_SS: P20.1 U1.57 | length 1223.7
  Top Layer w10: v1(5420.76,3379) 5420.76,3370.76 5384,3334 5384,3264.14 5413.14,3235 5428.31,3235 5482.5,3180.81 5482.5,3134.87 5562,3055.37 5562,2938.81 5617.5,2883.31 5617.5,2837.5 5820,2635 P20.1@5875,2635
  Bottom Layer w10: v1(5420.76,3379) 5429,3379 5436,3386 5436,3486.43 5430,3492.43 5430,3548.66 U1.57@5455.94,3574.6
GND: AConn.1 AConn.4 AConn.7 AConn.10 AConn.13 AConn.16 C2.2@2889.68,3508.23 C3.1@3039.69,3797.76 C4.1@3553.35,2481.85 C4.1@3971.65,3458.15 C5.2 C6.1 C7.1 C8.1 C9.1 C12.1 C13.1 C14.1 C16.1 C17.1 C18.1 C20.1 C21.1 C22.1 C25.1 C35.2 C36.2 C37.2 C38.2 C39.2 C40.2 C41.2 C42.2 C46.1 C47.1 C48.1 C49.1 C56.2 C57.2 C58.2 C59.2 C60.1 C61.1 C70.2 C71.1 C72.1 C73.2 D2.1 D3.2 D4.2 D5.2 D6.1 D7.1 H1.2 H1.8 H1.21 H1.22 H1.23 H1.24 H1.25 H1.26 H1.37 H2.2 H2.8 H2.21 H2.22 H2.23 H2.24 H2.25 H2.26 H2.37 H3.2 H3.21 H4.2 H4.21 I2C.3 MS1.2 MS1.3 P1.6 P2.6 P3.6 P4.6 P5.6 P6.3 P7.3 P8.3 P9.2 P11.2 P14.3 P15.6 P16.6 P20.6 P21.4 R1.2@3633.35,2436.26 R1.2@3891.65,3488.74 R2.2@3691.65,3488.74 R2.2@3833.35,2456.26 R3.1@3049.68,3340.83 R5.2 R6.1 R7.1 R70.1 S1.4 S1.GND S2.4 S2.GND S3.4 S3.GND U1.11 U1.32 U1.62 U1.81 U1.99 U3.3 U4.6 U4.11 U6.3 U6.8 U6.9 U6.10 U8.3 U8.8 U8.9 U8.10 U10.3 U10.8 U10.9 U10.10 U12.3 U12.8 U12.9 U12.10 U14.3 U14.8 U14.9 U14.10 U16.3 U16.8 U16.9 U16.10 UXBEE.10 | length 11014.8
  Top Layer w8: R3.1@3049.68,3340.83 3049.68,3325.32 v1(3090,3285) ; P11.2@4939.06,3797.32 4939.06,3670.94 5020,3590 C70.2@5024.06,3590 ; C72.1@5835,3493.5 5871.5,3493.5 5903.5,3461.5 ; R70.1@5903.5,3600 C71.1@5903.5,3535 5903.5,3461.5 ; AConn.16@5980,3345 5960,3365 5960,3405 5903.5,3461.5
  Top Layer w10: P9.2@2980,2720 3035.55,2720 3100.55,2785 C46.1@3108.5,2785 3108.5,2762.99 C35.2@3151.5,2720 3181.5,2690 3310,2690 ; U4.6@3040,3474.33 U4.6@3040.31,3474.65 3040.31,3517.95 U4.11@3079.68,3557.32 ; C36.2@3088.5,2515 3113.31,2490.2 v2(3113.31,2464.92) ; U6.3@3269.41,2501.89 3269.41,2430.59 3355,2345 P3.6@3355,2285 ; U6.10@3320.59,2738.11 3320.59,2700.59 3310,2690 ; U6.9@3346.18,2738.11 3346.18,2706.18 3330,2690 ; U6.8@3371.77,2738.11 3371.77,2701.77 3360,2690 3330,2690 ; U10.8@3448.23,2421.89 3448.23,2473.23 3469.41,2494.41 v1@3499.41,2494.41 ; U10.9@3473.82,2421.89 3473.82,2468.82 v1@3499.41,2494.41 ; C5.2@3478.78,3577.32 C5.2@3512.32,3577.32 ; U10.10@3499.41,2421.89 v1@3499.41,2494.41 ; U10.3@3550.59,2658.11 3550.59,2545.29 3516.8,2511.5 3516.5,2511.5 v1(3500,2495) v1@3499.41,2494.41 ; U14.8@3593.23,3746.89 3593.23,3711.77 v1@3618.82,3686.18 ; U14.9@3618.82,3746.89 v1@3618.82,3686.18 ; U14.10@3644.41,3746.89 3644.41,3711.77 v1@3618.82,3686.18 ; C39.2@3668.5,2435 3633.5,2470 3633.5,2506.8 3616.8,2523.5 3593.2,2523.5 3564.1,2494.41 v1@3499.41,2494.41 ; v1(3695,3925) 3695,3920 3695.59,3920.59 U14.3@3695.59,3983.11 ; C40.2@3731.5,2640 3731.5,2668.19 v2(3755,2691.69) ; C56.2@3813.5,3805 3813.5,3802.99 C61.1@3876.5,3740 3876.5,3733.5 v1(3915,3695) ; C49.1@3840,2408.5 v1@3895,2463.5 ; C57.2@3876.5,4010 3900,4010 3915,3995 v1(3915,3935) ; U12.8@3913.23,2406.89 3913.23,2445.28 v1@3895,2463.5 ; U12.9@3938.82,2406.89 3938.82,2446.18 3921.5,2463.5 ; U16.8@3948.23,3751.89 3948.23,3728.23 v1(3915,3695) ; U12.10@3964.41,2406.89 3964.41,2445.59 3946.5,2463.5 3921.5,2463.5 ; U16.9@3973.82,3751.89 3973.82,3723.82 3945,3695 ; U16.10@3999.41,3751.89 3999.41,3719.41 3975,3695 3945,3695 ; U12.3@4015.59,2643.11 4015.59,2680.59 4025,2690 4165,2690 v1(4180,2675) 4190,2675 4196.5,2668.5 C42.2@4196.5,2625 ; v1(4035,2510) 4065,2510 4090,2485 4090,2463.5 C41.2@4133.5,2420 ; v1(4045,3930) 4050.59,3935.59 U16.3@4050.59,3988.11 ; C58.2@4168.5,3805 4231.5,3742.01 C60.1@4231.5,3740 4236.5,3735 v1(4295,3735) 4351.36,3735 S1.GND@4408.69,3792.32 ; C59.2@4231.5,4015 4256.5,3990 4402.01,3990 S1.GND@4408.69,3983.32 ; U8.3@4336.89,2515.59 4309.41,2515.59 4285,2540 4285,2665 v1(4300,2680) 4316.5,2696.5 C38.2@4355,2696.5 ; v2(4350,3183.31) 4371.18,3162.13 C7.1@4406.61,3162.13 4480.87,3162.13 4562.36,3080.63 C8.1@4651.61,3080.63 ; v1(4410,3910) 4408.69,3911.32 S1.GND@4408.69,3983.32 ; D5.2@4455,3451.5 4486.5,3420 4553.5,3420 D4.2@4585,3451.5 4585,3560 P16.6@4605,3580 ; S1.4@4496.69,3962.32 4475.69,3983.32 S1.GND@4408.69,3983.32 ; C37.2@4560,2633.5 4525,2598.5 4525,2475 4535,2465 4572.52,2465 U8.10@4573.11,2464.41 4645.59,2464.41 ; U8.8@4573.11,2413.23 4594.41,2413.23 4645.59,2464.41 ; U8.9@4573.11,2438.82 4620,2438.82 ; C9.1@4655.43,3970 4725,3900.43 D3.2@4725,3877.99 ; v1(4675,2740) 4691.5,2723.5 C47.1@4691.5,2695 ; P5.6@4725,2565 4715,2565 4645.59,2495.59 4645.59,2464.41 ; UXBEE.10@4792.5,2960 4792.5,2947.5 v1(4830,2910) ; S2.GND@4794,2145 v1(4794,2240.5) ; S2.GND@4794,2336 v1(4794,2240.5) ; S2.4@4882,2315 4868.5,2315 v1(4794,2240.5) ; S3.GND@5089,2145 v1(5089,2240.5) ; S3.GND@5089,2336 v1(5089,2240.5) ; S3.4@5177,2315 5163.5,2315 v1(5089,2240.5) ; D6.1@5878.5,2835 5900,2835 5910,2845 5910,2960.56 ; D7.1@5878.5,2965 5905.56,2965 5910,2960.56 ; AConn.1@5980,3070 5970,3070 5910,3010 5910,2960.56 ; 3310,2690 3330,2690 ; v1@3895,2463.5 3921.5,2463.5 ; v1(3915,3695) 3945,3695
  Top Layer w35: v3(2920,3945) 2952.68,3912.32 D2.1@3004.65,3912.32 3004.65,3880.35 3039.69,3845.31 C3.1@3039.69,3797.76 ; C6.1@3270.12,3343.39 R5.2@3270.12,3422.32 3307.32,3422.32 3330,3445 3330,3470 3391.34,3531.34 v4(3391.34,3540.63)
  Bottom Layer w8: v1(5870,3600) 5870.39,3599.61 MS1.2@5943.27,3599.61 MS1.3@5943.27,3550.39
  Bottom Layer w10: R6.1@2844.41,2613.31 2844.41,2659.41 v1(2845,2660) ; H1.8@2947.95,2218.86 H1.37@2947.95,2283.82 ; H1.37@2947.95,2472.8 H1.21@2947.95,2537.76 ; H1.37@2979.45,2468.86 H1.22@2979.45,2537.76 ; v2(2983.39,2464.92) v2(3026.69,2464.92) ; H1.37@3010.94,2480.67 H1.23@3010.94,2537.76 ; C18.1@3034.09,2613.31 3042.44,2604.96 H1.24@3042.44,2537.76 H1.37@3042.44,2480.67 ; H1.37@3073.94,2468.86 H1.25@3073.94,2537.76 ; H1.37@3105.43,2472.8 H1.26@3105.43,2537.76 ; H1.2@3136.93,2218.86 H1.37@3136.93,2268.07 ; C21.1@3276.81,2206.81 C21.1@3270.91,2206.81 3297.72,2180 3314.5,2180 v1(3315,2180.5) ; v1(3500,2495) 3513.15,2481.85 C4.1@3553.35,2481.85 ; H3.21@3713.66,2736.97 H3.2@3713.66,2788.15 ; H4.2@3811.34,3156.85 H4.21@3811.34,3208.03 ; v1@4031.69,3378.31 R7.1@4087.8,3378.31 ; H2.8@4184.65,2980.55 H2.37@4184.65,3045.51 ; H2.37@4184.65,3234.49 H2.21@4184.65,3299.45 ; H2.37@4216.14,3230.55 H2.22@4216.14,3299.45 ; H2.37@4247.64,3242.36 H2.23@4247.64,3299.45 ; C22.1@4275.79,3378.31 4279.13,3374.96 H2.24@4279.13,3299.45 H2.37@4279.13,3242.36 ; H2.37@4310.63,3230.55 H2.25@4310.63,3299.45 ; H2.37@4342.13,3234.49 H2.26@4342.13,3299.45 ; H2.37@4373.62,3029.76 H2.2@4373.62,2980.55 4378.5,2975.67 4378.5,2936.5 4389,2926 4482.5,2926 C25.1@4500,2943.5 ; v1(4890,3460) 4927.73,3497.73 C17.1@4927.73,3502.27 ; U1.32@5034.18,3407.57 5071.75,3370 v1(5105,3370) ; v1(5040,2890) 5047.73,2897.73 C14.1@5047.73,2942.73 ; U1.11@5145.54,3041.49 5169.4,3065.35 5219.65,3065.35 v1(5225,3060) ; C13.1@5307.73,2821.39 v1(5344.14,2784.98) 5420,2860.84 5420,2882.56 U1.99@5386.35,2916.21 ; v1(5475,3455) 5475.54,3455 U1.62@5525.54,3505 ; v1@5570,3190.63 5609.1,3190.63 5609.73,3190 5613.66,3190 U1.81@5636.9,3166.76 ; C16.1@5610.36,3524.97 v1(5648.2,3487.13) v1@5648.2,3480.06 ; C12.1@5748.72,3176.98 5750,3175.69 5750,3235 v1(5760,3245)
  Bottom Layer w20: v3(3624.57,3488.74) R2.2@3691.65,3488.74 ; R1.2@3633.35,2436.26 R1.2@3658.35,2436.26 ; R2.2@3833.35,2456.26 3847.09,2470 3852.09,2465 v1(3895,2465)
  Bottom Layer w30: R1.2@3891.65,3488.74 3948.74,3488.74 P15.6@4040,3580 ; C4.1@3971.65,3458.15 C4.1@3975.76,3458.15
  Bottom Layer w40: C73.2@2830.91,3100 2885,3100 v4(2925,3140)
  other v1: 5570,3185 4330,3375 4030,3380 3620,3685 4695,3930.43
  other v2: 2940.08,2291.69 2983.39,2291.69 3026.69,2291.69 3070,2291.69 3113.31,2291.69 2940.08,2335 2983.39,2335 3026.69,2335 3070,2335 3113.31,2335 2940.08,2378.31 2983.39,2378.31 3026.69,2378.31 3070,2378.31 3113.31,2378.31 2940.08,2421.61 2983.39,2421.61 3026.69,2421.61 3070,2421.61 3113.31,2421.61 2940.08,2464.92 3070,2464.92 3711.69,2691.69 3711.69,2735 3755,2735 4176.77,3053.39 4220.08,3053.39 4263.39,3053.39 4306.69,3053.39 4350,3053.39 4176.77,3096.69 4220.08,3096.69 4263.39,3096.69 4306.69,3096.69 4350,3096.69 4176.77,3140 4220.08,3140 4263.39,3140 4306.69,3140 4350,3140 4176.77,3183.31 4220.08,3183.31 4263.39,3183.31 4306.69,3183.31 3770,3210 3813.31,3210 4176.77,3226.61 4220.08,3226.61 4263.39,3226.61 4306.69,3226.61 4350,3226.61 3770,3253.31 3813.31,3253.31 3058.03,3557.32 3101.34,3557.32
  other v4: 3428.31,3248.35 3498.31,3248.35 2852.99,3595.67 2922.99,3595.67 3391.34,3610.63
MISO: P5.3 U1.22 U6.6 U8.6 U10.6 U12.6 U14.6 U16.6 | length 5999.1
  Top Layer w10: U6.6@3346.18,2501.89 3346.18,2468.82 3355,2460 3390,2460 3400,2470 3400,2525 3473.82,2598.82 U10.6@3473.82,2658.11 3473.82,2786.19 3542.63,2855 3543.13,2854.5 3895.5,2854.5 v1(3900,2850) ; U14.6@3618.82,3983.11 3618.82,3871.18 v1(3630,3860) ; U12.6@3938.82,2643.11 3938.82,2716.19 3997.63,2775 v1(4030,2775) ; U16.6@3973.82,3988.11 3971.5,3985.79 3971.5,3878.5 v1(3985,3865) ; v1@4245,2440 4255,2430 4255,2399.7 4274.69,2380 4380,2380 4397.23,2397.23 4460.14,2397.23 4503.37,2354 4586.37,2354 4722.37,2490 4890,2490 P5.3@4965,2565 4965,2600 4984,2619 4984,2641.37 4996,2653.37 4996,2871.07 4995.5,2871.57 4995.5,3143.13 5029,3176.63 5029,3249 v1(5040,3260) 5105.31,3260 5132,3286.7 5132,3311.44 5167,3346.44 5167,3588.25 5032.5,3722.75 5032.5,3860.13 5000.13,3892.5 4952.5,3892.5 4940,3905 v1(4890,3905) ; v1@4246.18,2438.82 U8.6@4336.89,2438.82
  Bottom Layer w10: v1(3630,3860) 3677.37,3860 3688.37,3849 3866.63,3849 3882.63,3865 v1(3985,3865) 4032.37,3865 4043.37,3854 4681.63,3854 4762.63,3935 4860,3935 v1(4890,3905) ; v1(3900,2850) 3915,2835 3930,2835 3990,2775 v1(4030,2775) 4120.31,2775 4235,2660.3 4235,2450 4245,2440 v1(4255,2440) ; U1.22@4992.43,3194.6 5040,3242.18 v1(5040,3260)
MOSI: P5.4 P20.4 U1.21 U6.7 U8.7 U10.7 U12.7 U14.7 U16.7 | length 7454.8
  Top Layer w10: U6.7@3371.77,2501.89 3371.77,2531.77 3448.23,2608.23 U10.7@3448.23,2658.11 3448.23,2783.23 3536,2871 3880.7,2871 3888.2,2878.5 3911.8,2878.5 3925.8,2864.5 4023.43,2864.5 4049.5,2838.43 4049.5,2818.43 4062.93,2805 v1(4085,2805) ; U14.7@3593.23,3983.11 3593.23,3831.77 v1(3600,3825) ; U12.7@3913.23,2643.11 3913.23,2713.23 4005,2805 v1(4005,2820) ; U16.7@3948.23,3988.11 3948.23,3836.77 v1(3955,3830) ; v1(4285,2410) 4288.23,2413.23 U8.7@4336.89,2413.23 4466.77,2413.23 4510,2370 4579.75,2370 4715.75,2506 4826,2506 P5.4@4885,2565 4980,2660 4980,2864.44 4979.5,2864.94 4979.5,3149.75 5013,3183.25 5013,3246.7 5011.5,3248.2 5011.5,3271.8 5039.69,3300 5062.63,3300 5072.63,3290 5087.93,3290 5151,3353.07 5151,3581.63 5016.5,3716.13 5016.5,3853.5 4993.5,3876.5 4878.19,3876.5 4849.69,3905 v1(4840,3905) ; v1(4995,2385) 5016,2364 5196,2364 5220,2340 5220,2215 5316.05,2118.95 5728.95,2118.95 5820,2210 5820,2340 P20.4@5875,2395
  Bottom Layer w10: v1(3600,3825) 3680.37,3825 3688.37,3833 3952,3833 v1(3955,3830) 4042,3830 4050,3838 4688.25,3838 4755.25,3905 v1(4840,3905) ; v1(4005,2820) 4005,2805 v1(4085,2805) 4112.93,2805 4251,2666.93 4251,2504 4285,2470 v1(4285,2410) ; P5.4@4885,2565 4885,2495 v1(4995,2385) ; U1.21@5006.35,3180.68 5006.35,3184.61 5030.21,3208.48 5030.21,3209.76 5056,3235.55 5056,3235.7 5095,3274.7 v1(5095,3290)
MOT1_A: H1.11 U1.6 | length 3235.9
  Bottom Layer w10: H1.11@2867.24,2268.07 2818.07,2268.07 2795,2245 2795,2160 2835,2120 4613.14,2120 4685,2191.86 4685,2547.02 4684,2548.02 4684,2581.98 4712.02,2610 4937.88,2610 5178,2850.12 5178,2934.75 U1.6@5215.14,2971.89
MOT1_B: H1.3 U1.7 | length 2799.7
  Bottom Layer w10: H1.3@3105.43,2218.86 3105.43,2159.57 3129,2136 4606.51,2136 4669,2198.49 4669,2540.39 4668,2541.39 4668,2588.61 4705.39,2626 4931.25,2626 5162,2856.75 5162,2947 5168.18,2953.18 5168.59,2953.18 U1.7@5201.22,2985.81
MOT1_EN: H1.4 U1.8 | length 2812.9
  Top Layer w10: v1(3073.94,2170) 3145,2170 3145,2167.3 v1(3142.54,2164.85)
  Bottom Layer w10: v1(3073.94,2170) H1.4@3073.94,2218.86 ; v1(3142.54,2164.85) 3217.15,2164.85 3230,2152 4599.88,2152 4653,2205.12 4653,2533.76 4652,2534.76 4652,2595.24 4698.76,2642 4924.63,2642 5146,2863.37 5146,2958.43 U1.8@5187.3,2999.73
MOT1_ENCA: P1.3 U6.12 | length 378.1
  Top Layer w10: U6.12@3269.41,2738.11 3269.41,2834.41 3355,2920 3445,2920 P1.3@3495,2970
MOT1_ENCB: P1.4 U6.11 | length 434.2
  Top Layer w10: U6.11@3295,2738.11 3295,2837.37 3361.63,2904 3509,2904 P1.4@3575,2970
MOT1_FB: C18.2 H1.20 R6.2 U1.96 | length 3830.6
  Top Layer w10: v1(2930,2660) 2930,2645 2880,2595 2880,2265 2930,2215 3049.37,2215 3060.37,2226 3341.63,2226 3354.13,2213.5 3371.8,2213.5 3385.3,2200 v1(3445,2200) ; v1(5085,2875) 5230,3020 v1(5340,3020)
  Bottom Layer w10: H1.20@2916.46,2537.76 H1.20@2916.46,2558.66 ; v1(2930,2660) 2907.4,2637.4 R6.2@2907.4,2613.31 2916.46,2604.25 H1.20@2916.46,2558.66 ; C18.2@2971.1,2613.31 H1.20@2916.46,2558.66 ; v1(3445,2200) 3450,2200 3466,2184 4586.63,2184 4621,2218.37 4621,2520.51 4620,2521.51 4620,2608.49 4685.51,2674 4874.76,2674 5022,2821.24 5022,2827.51 5029.49,2835 5055,2835 5085,2865 v1(5085,2875) ; v1(5340,3020) 5350,3020 5370,3000 5386.08,3000 U1.96@5428.1,2957.97
MOT1_FS: H1.9 U1.9 | length 2997.8
  Top Layer w10: v1(2930,2155) 2930,2165 2964,2199 3056,2199 3067,2210 3335,2210 v1(3360,2185)
  Bottom Layer w10: H1.9@2916.46,2218.86 2916.46,2168.54 v1(2930,2155) ; v1(3360,2185) 3385,2185 3402,2168 4593.25,2168 4637,2211.75 4637,2527.14 4636,2528.14 4636,2601.86 4692.14,2658 4918,2658 5130,2870 5130,2970 5140,2980 5140,2980.27 U1.9@5173.38,3013.65
MOT1_OUT1: H1.14 H1.15 H1.17 H1.18 P1.1 | length 1352.5
  Bottom Layer w20: 2790,2395 2822.44,2362.56 H1.14@2867.24,2362.56 ; 2790,2435 2830.94,2394.06 H1.15@2867.24,2394.06 ; 2790,2495 2827.95,2457.05 H1.17@2867.24,2457.05 ; 2790,2530 2831.46,2488.54 H1.18@2867.24,2488.54
  Bottom Layer w40: 2795,2395 2795,2740 3025,2970 P1.1@3335,2970